# Altium PCB PCB-Mod.PcbDoc (part 1 of 2)
Units mil, origin at the board's own origin, x right, y up, seen from the top; angles counter-clockwise.
Board outline 2755.91 x 1181.1 mil, 4 copper layers (Top Layer, Layer 2, Layer 3, Bottom Layer), stack 61.865 mil thick; 89 components, 59 nets, 279 pads, 158 vias.
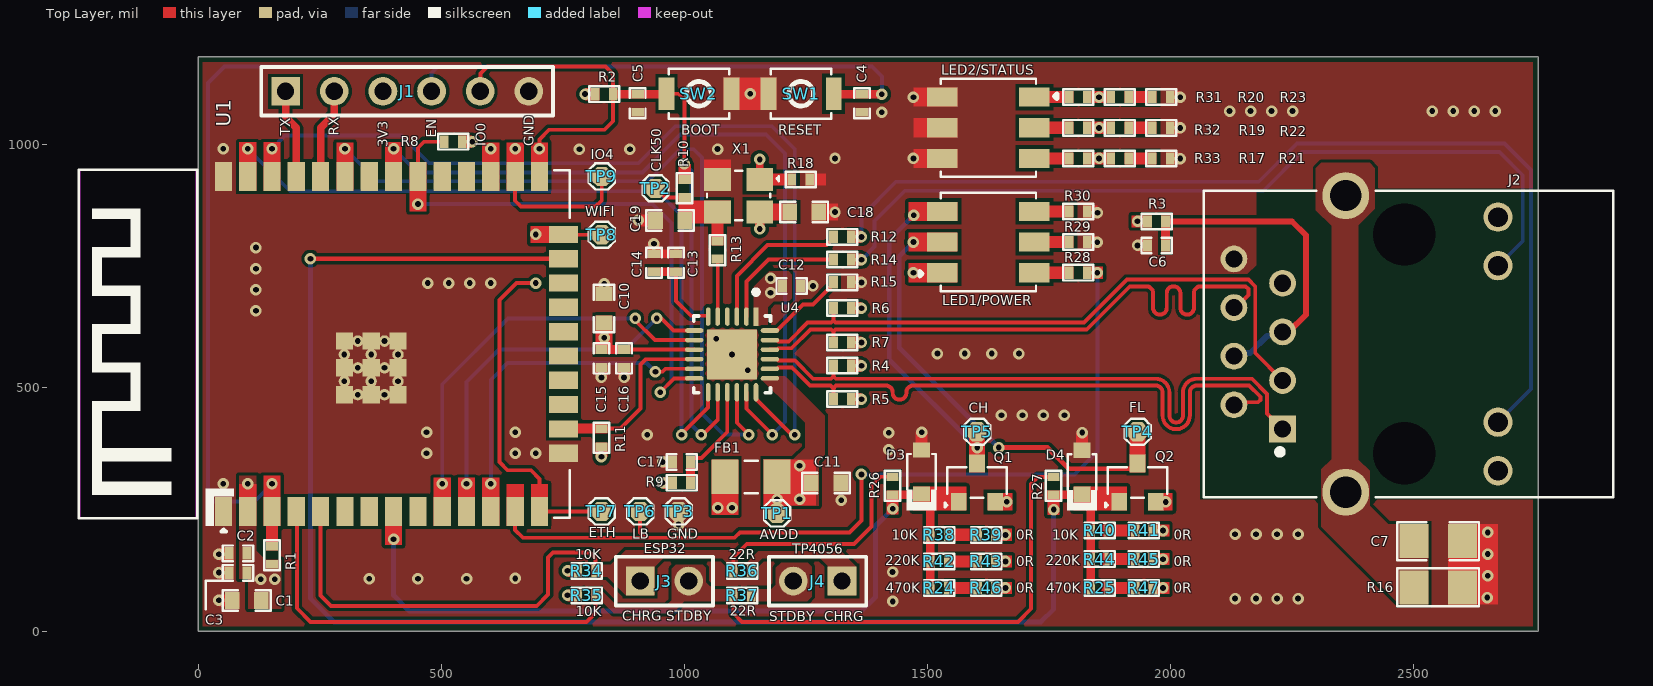
[diagram p0: Top Layer view]
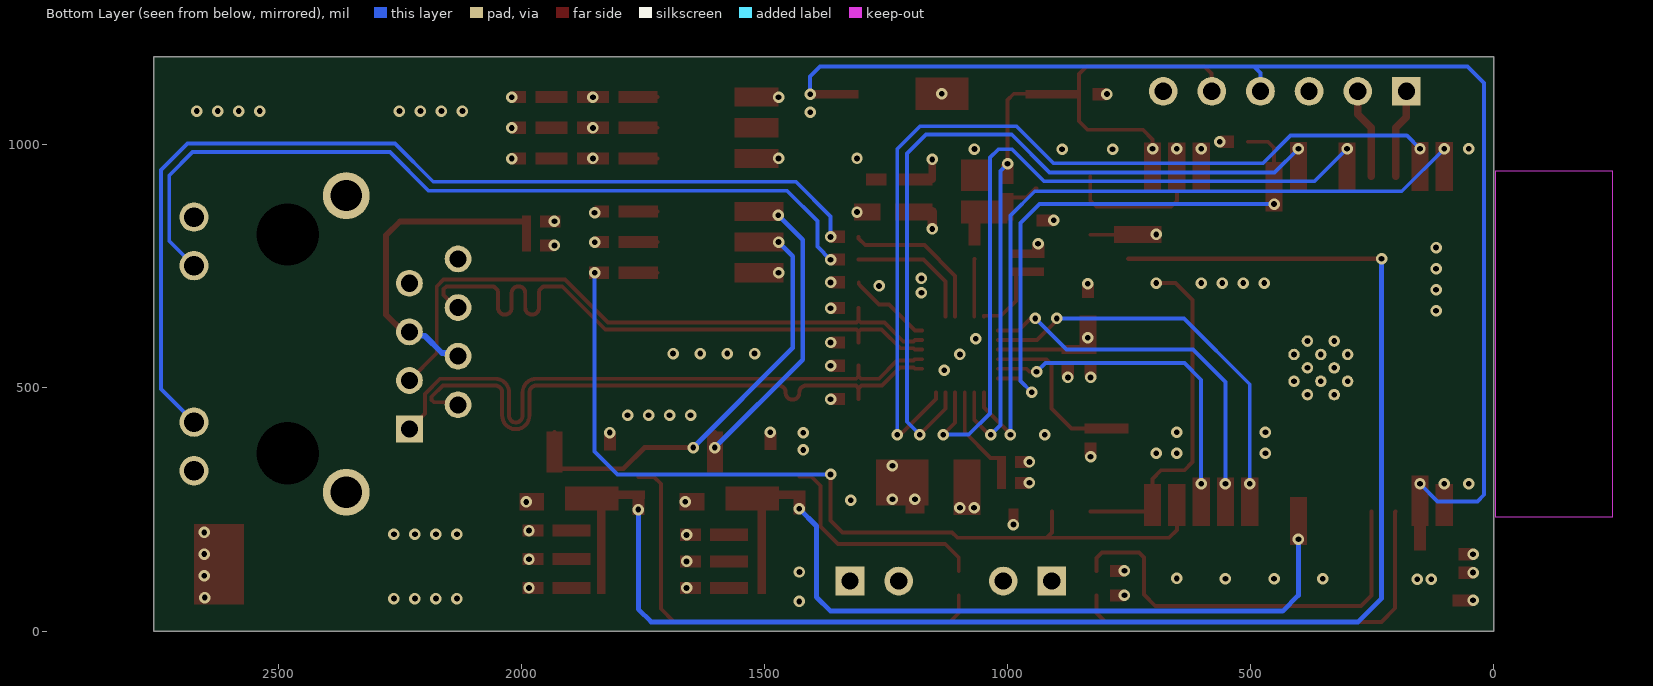
[diagram p1: Bottom Layer view, seen from below]
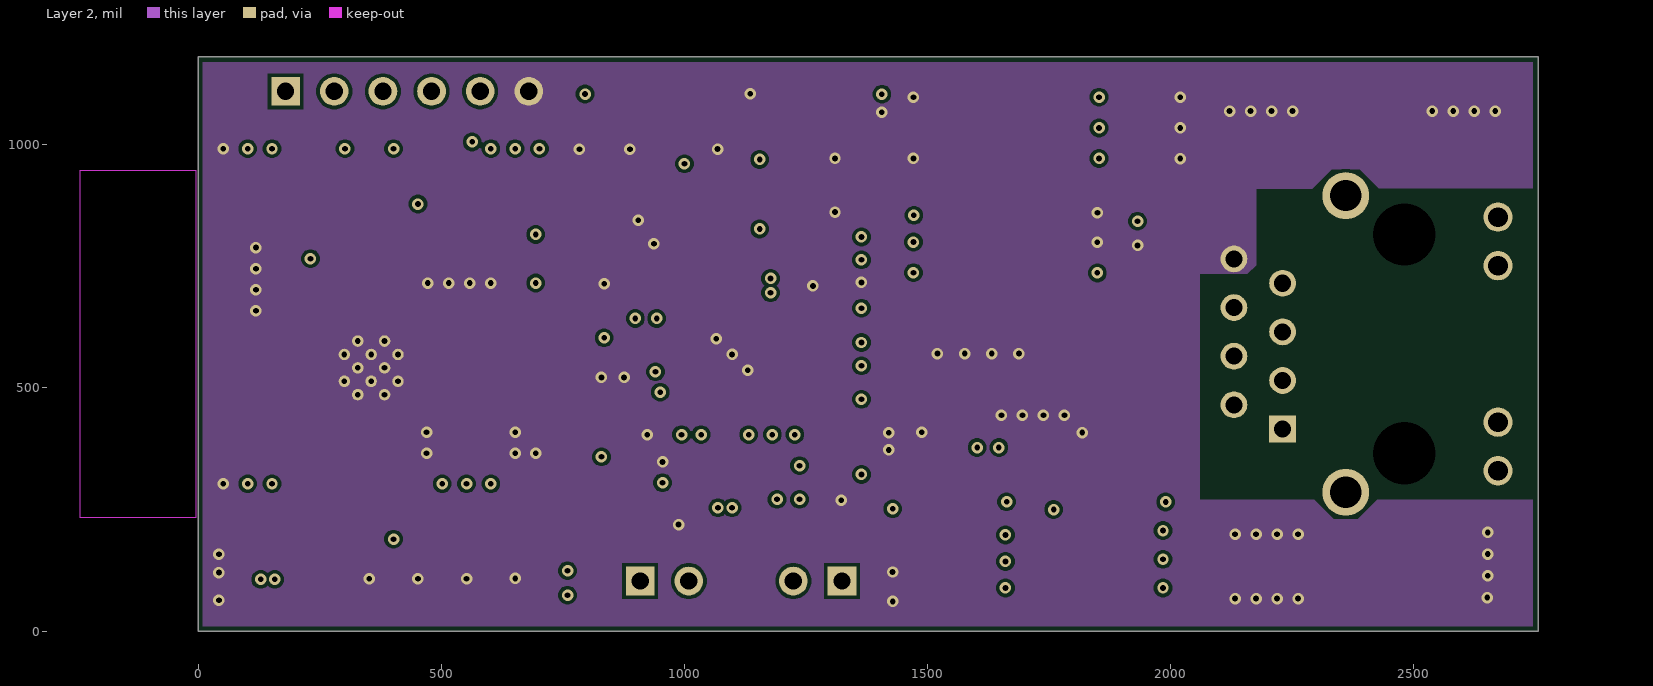
[diagram p2: Layer 2]
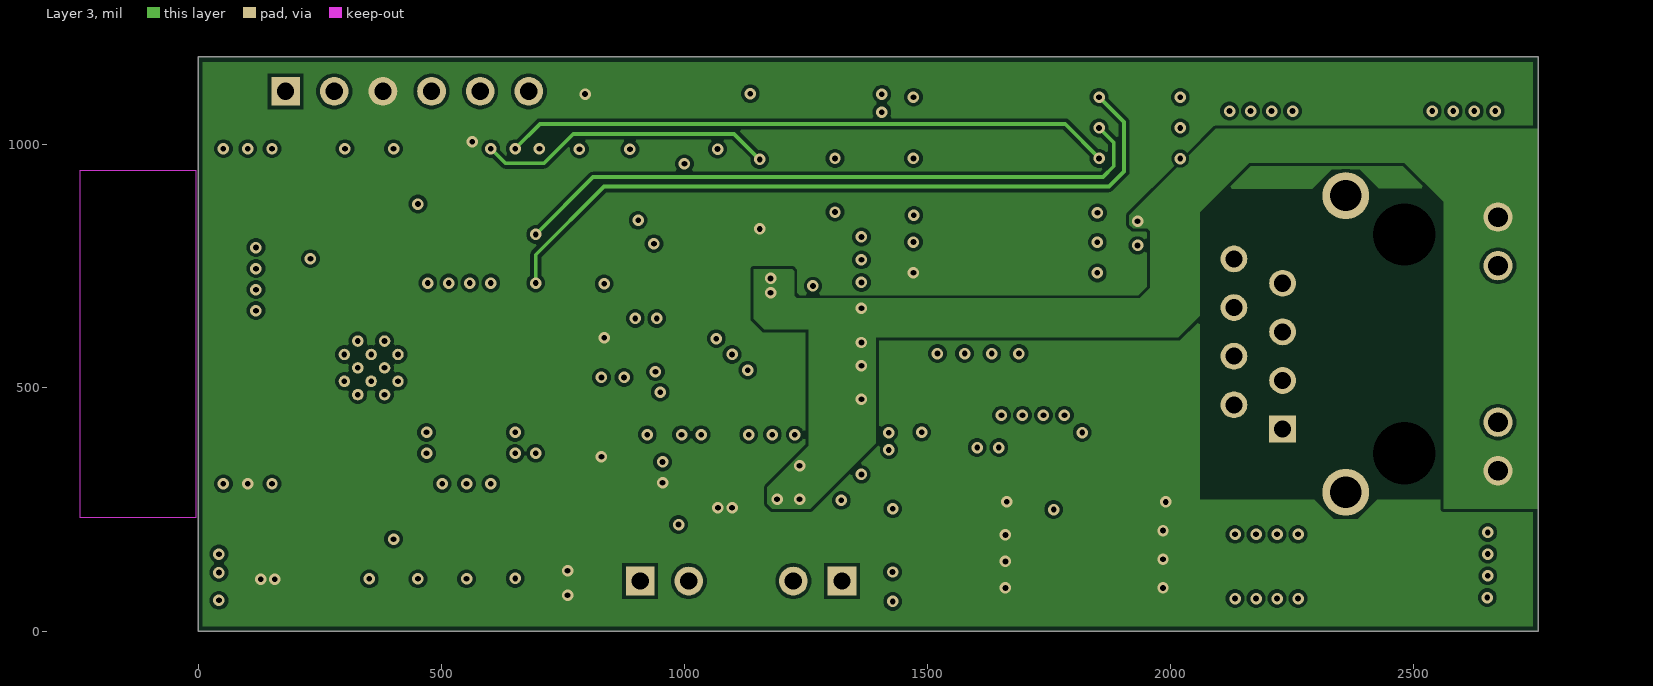
[diagram p3: Layer 3]
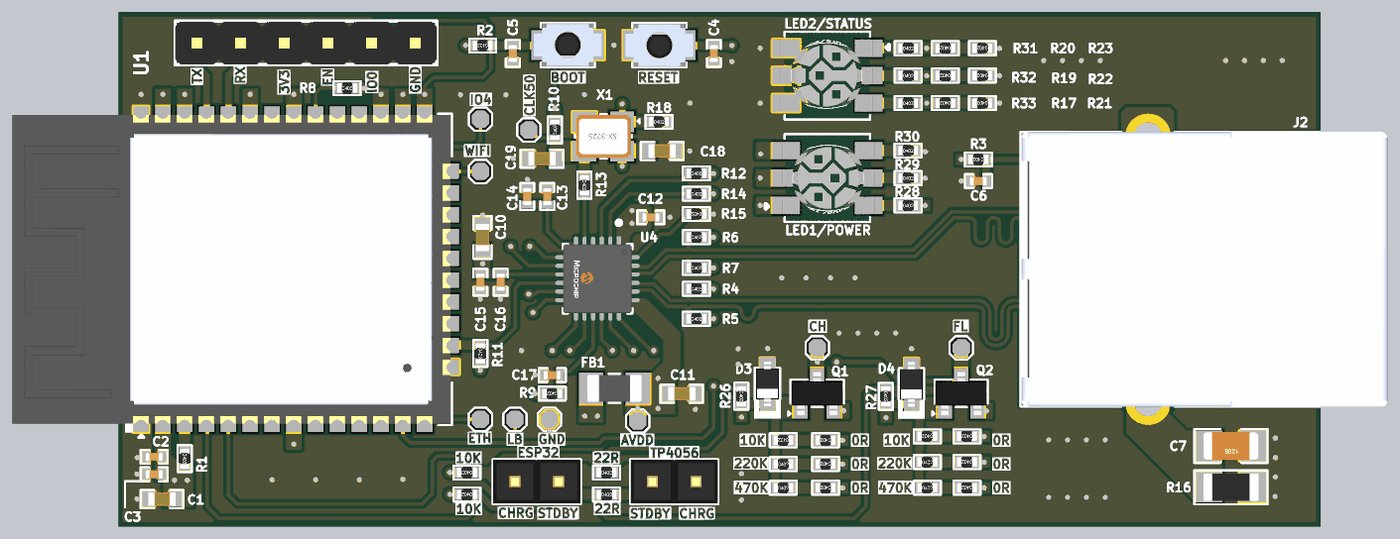
[diagram p4: 3D render of the assembled board from above, using the file's embedded part models]

## Layer stack, top to bottom
Top Solder: solder mask 0.787, Solder Resist, Dk 3.5
Top Layer: signal copper 1.378
Dielectric 2: prepreg 7.992, PP-006, Dk 4.1
Layer 2: signal copper 0.598
Dielectric 1: dielectric 41.929, FR-4, Dk 4.8
Layer 3: signal copper 0.598
Dielectric 3: prepreg 7.992, PP-006, Dk 4.1
Bottom Layer: signal copper 1.378
Bottom Solder: solder mask 0.787, Solder Resist, Dk 3.5

## Board outline
0,0 0,1181.1 2755.91,1181.1 2755.91,0

## Design rules (kind name [scope] priority, off if disabled: settings)
Clearance Clearance_1 [InAnyDifferentialPair] p1: gap=7 ignorepadtopadclearanceinfootprint=FALSE except(6: Arc-Arc Arc-Track Track-Track)
Clearance [All] p2: gap=7 ignorepadtopadclearanceinfootprint=FALSE
DiffPairsRouting [InDifferentialPairClass('Ethernet_Lines')] p1: maxlimit=7 minlimit=6 mostfreqgap=7 toplayer_maxgap=6 toplayer_prefgap=6 toplayer_minwidth=8 toplayer_maxwidth=8 toplayer_prefwidth=8 bottomlayer_maxgap=6 bottomlayer_prefgap=6 bottomlayer_minwidth=8 bottomlayer_maxwidth=8 bottomlayer_prefwidth=8 impedanceprofiledriven=TRUE impedanceprofileid={3DFD65A5-B5EC-4C43-AC0F-D5EC94D6A33B} impedanceprofilevalue=100.000000 maxuncoupledlength=500
HoleSize [All] p1: absolutevalues=TRUE maxlimit=472.44 minlimit=1 maxpercent=80.000 minpercent=20.000
HoleToHoleClearance [All] p1: gap=5 allowstackedmicrovias=TRUE
MatchedLengths "Schematic Matched Net Lengths_1" [InNetClass('Ethernet')] p1: tolerance=20 checknetsindiffpair=FALSE checkdiffpairvsdiffpair=TRUE checkxsignals=TRUE checkothers=TRUE
MaxMinImpedance "Schematic Impedance Constraint" [InNetClass('Ethernet')] p1: minimum=97.00 maximum=105.0
MinimumSolderMaskSliver [All] p1: minsoldermaskwidth=0
PlaneConnect [All] p1: planeconnectstyle=Direct reliefexpansion=20 reliefentries=4 reliefconductorwidth=10 reliefairgap=10
PolygonConnect [All] p1: connectstyle=Direct reliefconductorwidth=10 reliefentries=4 polygonreliefangle="90 Angle" airgapwidth=10
RoutingVias [All] p1: holewidth=11.81 width=23.62 viastyle="Through Hole" minholewidth=11.81 minwidth=23.62 maxholewidth=11.81 maxwidth=23.62
SilkToSilkClearance [All] p1: silktosilkclearance=0
SilkToSolderMaskClearance [IsPad] p1: minsilkscreentomaskgap=0 clearancetoexposedcopper=TRUE
SolderMaskExpansion [All] p1: expansion=4 istentingtop=FALSE
SupplyNets "Schematic Supply Nets_2" [InNet('+3.3_OUT')] p1: voltage=0.000
SupplyNets "Schematic Supply Nets_1" [InNet('GND')] p2: voltage=0.000
SupplyNets "Schematic Supply Nets" [InNet('AVDD')] p3: voltage=0.000
UnRoutedNet [All] p1: checkbadconnections=TRUE
Width [All] p1: maxlimit=50 minlimit=7 preferedwidth=15 minimp=50.000000 maximp=50.000000 favimp=50.000000
22 further rules are at their usual default settings.

## Classes and differential pairs
differential pair class Ethernet_Lines: RX TX
net class Ethernet: RX_N RX_P TX_N TX_P
component class LED_Sheet: D3 D4 J3 J4 LED1/POWER LED2/STATUS Q1 Q2 R17 R19 R20 R21 R22 R23 R24 R25 R26 R27 R28 R29 R30 R31 R32 R33 R34 R35 R36 R37 R38 R39 R40 R41 R42 R43 R44 R45 R46 R47 TP4 TP5 TP6 TP7 TP8 TP9
component class LAN8720A: C6 C7 C10 C11 C12 C13 C14 C15 C16 C17 C18 C19 FB1 J2 R3 R4 R5 R6 R7 R8 R9 R10 R11 R12 R13 R14 R15 R16 R18 TP1 TP2 TP3 U4 X1
component class ESP32: C1 C2 C3 C4 C5 J1 R1 R2 SW1 SW2 U1
differential pair TX: +TX_P -TX_N
differential pair RX: +RX_P -RX_N

## Components (designator, comment, footprint, x,y, rotation, side; value= is the part's Value field where it differs from the comment)
C1 "10uF" Cap-0603 100,63 r180 top
C2 "100nF" cap-0402 82,160.02 r0 top
C3 "100nF" cap-0402 82,120.01 r0 top
C4 "100nF" cap-0402 1365,1085.61 r270 top
C5 "100nF" cap-0402 904.04,1085.6 r270 top
C6 "4.7nF" Cap-0402 1971,792.87 r0 top locked
C7 "4.7nF" Cap-1206 2550,185 r180 top
C10 "10uF" Cap-0603 834.69,663.61 r270 top
C11 "10uF" Cap-0603 1291.16,304.78 r180 top
C12 "100nF" cap-0402 1220.35,709.89 r0 top
C13 "1uF" Cap-0402 983.07,757.33 r270 top
C14 "4.7nF" Cap-0402 937.11,757.53 r90 top
C15 "100nF" cap-0402 829.69,560.8 r270 top
C16 "100nF" cap-0402 876.19,560.8 r270 top
C17 "100nF" cap-0402 994.27,347.5 r0 top
C18 "10uF" Cap-0603 1246.35,861.98 r180 top
C19 "15pF" Cap-0603 970.57,844.48 r0 top
D3 "MM3Z3V3" SOD-323 1487.6,327.26 r90 top
D4 "MM3Z3V3" SOD-323 1817.6,326.52 r90 top
FB1 "100MHz" IND-1206 1137,317.28 r180 top
J1 "X6511WV-06H-C60D30" HDR1X6_ 180,1110 r0 top
J2 "HR911105A" HR911105A 2401.57,590.55 r270 top locked
J3 "826629-2" HDR1X2_ 909,103 r0 top
J4 "826629-2" HDR1X2_ 1324,103 r180 top
LED1/POWER "MHP5050RGBDT" MHP5050RGBDT 1625,800 r0 top (schematic designator LED1)
LED2/STATUS "MHP5050RGBDT" MHP5050RGBDT 1625,1035 r180 top (schematic designator LED2)
Q1 "WPM2341-3/TR" Sot-23 1601.6,305.26 r0 top
Q2 "WPM2341-3/TR" Sot-23 1931.6,305.26 r0 top
R1 "10K" Res-0402 152,156 r270 top
R2 "10K" Res-0402 835,1104.11 r180 top
R3 "0R" Res-0402 1971,842.52 r180 top locked
R4 "49.9R" Res-0402 1324.85,545.83 r0 top
R5 "49.9R" Res-0402 1324.85,477.01 r0 top
R6 "49.9R" Res-0402 1324.85,664.32 r0 top
R7 "49.9R" Res-0402 1324.85,593.82 r0 top
R8 "1.5K" Res-0402 524.43,1006.38 r0 top
R9 "10K" Res-0402 994.28,305.1 r180 top
R10 "33R" Res-0402 1000.57,910.39 r90 top
R11 "10K" Res-0402 829.69,397.5 r270 top
R12 "470R" Res-0402 1324.85,810.82 r0 top
R13 "33R" Res-0402 1068.14,783.45 r270 top
R14 "470R" Res-0402 1324.85,763.82 r0 top
R15 "12.1k" Res-0402 1324.85,717.32 r180 top
R16 "1M" Res-1206 2550,90 r180 top
R17 "0R" Res-0402 1895.31,972.01 r180 top
R18 "10K" Res-0402 1239.06,928.91 r0 top
R19 "0R" Res-0402 1895.31,1035 r180 top
R20 "0R" Res-0402 1895.31,1097.99 r180 top
R21 "10K" Res-0402 1980.5,972.01 r180 top
R22 "10K" Res-0402 1980.5,1035 r180 top
R23 "10K" Res-0402 1980.5,1097.99 r180 top
R24 "470K" Res-0402 1524,89 r0 top value=470kR
R25 "470K" Res-0402 1854,89 r0 top value=470kR
R26 "0R" Res-0402 1428,299 r270 top
R27 "0R" Res-0402 1759,298.73 r270 top
R28 "100R" Res-0402 1810,737.01 r0 top
R29 "100R" Res-0402 1810,800 r0 top
R30 "100R" Res-0402 1810,862.99 r0 top
R31 "100R" Res-0402 1810.11,1097.99 r0 top
R32 "100R" Res-0402 1810.11,1035 r0 top
R33 "100R" Res-0402 1810.11,972.01 r0 top
R34 "100K" Res-0402 799,123.88 r180 top
R35 "100K" Res-0402 799,73.47 r180 top
R36 "22R" Res-0402 1119,123.88 r0 top
R37 "22R" Res-0402 1119,73.47 r0 top
R38 "10K" Res-0402 1524,198 r180 top
R39 "0R" Res-0402 1621,198 r180 top
R40 "10K" Res-0402 1854,207 r180 top
R41 "0R" Res-0402 1945,207 r180 top
R42 "220K" Res-0402 1524,143.5 r0 top
R43 "0R" Res-0402 1621,143.5 r180 top
R44 "220K" Res-0402 1854,148 r0 top
R45 "0R" Res-0402 1945,148 r180 top
R46 "0R" Res-0402 1621,89 r180 top
R47 "0R" Res-0402 1945,89 r180 top
SW1 "B3U-1000P" B3U-1000P 1240,1105 r0 top
SW2 "B3U-1000P" B3U-1000P 1030,1105 r180 top
TP1 "TEST POINT 0.5mm Dia" "Test-point - 0.5mm" 1190.55,242 r90 top
TP2 "TEST POINT 0.5mm Dia" "Test-point - 0.5mm" 940.57,910.39 r90 top
TP3 "TEST POINT 0.5mm Dia" "Test-point - 0.5mm" 987.99,246.06 r90 top
TP4 "TEST POINT 0.5mm Dia" "Test-point - 0.5mm" 1932,410 r90 top
TP5 "TEST POINT 0.5mm Dia" "Test-point - 0.5mm" 1602,410 r90 top
TP6 "TEST POINT 0.5mm Dia" "Test-point - 0.5mm" 909,246.06 r90 top
TP7 "TEST POINT 0.5mm Dia" "Test-point - 0.5mm" 829.69,246.06 r90 top
TP8 "TEST POINT 0.5mm Dia" "Test-point - 0.5mm" 830,815 r90 top
TP9 "TEST POINT 0.5mm Dia" "Test-point - 0.5mm" 830,935 r90 top
U1 "ESP32-WROOM-32E-N4" "38-SMD Module" 401.57,590.55 r90 top locked
U4 "LAN8720A-CP-TR" LAN8720A-CP-TR 1098,569 r270 top locked
X1 "50MHz" OT2EL4C4JI-111OLP-50M 1111.45,895.45 r180 top

## Footprints (in the part's own frame and the unit in brackets; to place one, negate y for a bottom-side part, rotate by r counter-clockwise, add the part's x,y. Pads: shape width x height; smd on the part's side, far side on the other; paste and mask are expansions set on the pad)
"38-SMD Module" [mm]
  rect 1.5x0.9 smd: 1(-8.75,8.88) 2(-8.75,7.61) 3(-8.75,6.34) 4(-8.75,5.07) 5(-8.75,3.8) 6(-8.75,2.53) 7(-8.75,1.26) 8(-8.75,-0.01) 9(-8.75,-1.28) 10(-8.75,-2.55) 11(-8.75,-3.82) 12(-8.75,-5.09) 13(-8.75,-6.36) 14(-8.75,-7.63) 25(8.75,-7.63) 26(8.75,-6.36) 27(8.75,-5.09) 28(8.75,-3.82) 29(8.75,-2.55) 30(8.75,-1.28) 31(8.75,-0.01) 32(8.75,1.26) 33(8.75,2.53) 34(8.75,3.8) 35(8.75,5.07) 36(8.75,6.34) 37(8.75,7.61) 38(8.75,8.88)
  rect 0.9x1.5 smd: 15(-5.71,-8.88) 16(-4.44,-8.88) 17(-3.17,-8.88) 18(-1.9,-8.88) 19(-0.63,-8.88) 20(0.64,-8.88) 21(1.91,-8.88) 22(3.18,-8.88) 23(4.45,-8.88) 24(5.72,-8.88)
  rect 0.9x0.9 smd: 39(-2.65,2.56) 40(-1.25,2.56) 41(0.15,2.56) 42(-2.65,1.16) 43(-1.25,1.16) 44(0.15,1.16) 45(-2.65,-0.24) 46(-1.25,-0.24) 47(0.15,-0.24)
  round 0.6 hole 0.3 mask+0: 39_10(-1.95,2.56) 39_11(-0.55,2.56) 39_12(-2.65,1.86) 39_13(-1.25,1.86) 39_14(0.15,1.86) 39_15(-1.95,1.16) 39_16(-0.55,1.16) 39_17(-2.65,0.46) 39_18(-1.25,0.46) 39_19(0.15,0.46) 39_20(-1.95,-0.24) 39_21(-0.55,-0.24)
  Keep-Out Layer region: -9.042,10.287 9.042,10.287 9.042,16.383 -9.042,16.383
  silkscreen extent -9.8,-9.22 9.09,16.43, body extent -9,-9.12 9,16.38, height 3.25
B3U-1000P [mm] "SWITCH TACTILE SPST-NO 0.05A 12V"
  rect 0.82x1.72 smd: 1(-1.7,0) 2(1.7,0)
  silkscreen extent -1.57,-1.3 1.57,1.3, body extent -2,-1.26 2,1.24, height 1.6
cap-0402 [mil]
  rect 18x25 smd mask+2.36: 1(-18.5,0) 2(18.5,0)
  silkscreen extent -31,-16 31,16, body extent -20,-10 20,10, height 19
Cap-0402 [mil]
  rect 18x25 smd mask+2.36: 1(-18.5,0) 2(18.5,0)
  silkscreen extent -31,-16 31,16, body extent -20,-10 20,10, height 19
Cap-0603 [mil]
  rect 30x35 smd mask+2.36: 1(-30,0) 2(30,0)
  silkscreen extent -49,-21 49,21, body extent -32,-16 31,16, height 34
Cap-1206 [mil] "SMD 1206"
  rect 60x70 smd: 1(-50,0) 2(50,0)
  silkscreen extent -84,-39 84,39, body extent -63,-31 63,32, height 39
HDR1X2_ [mm] "CONN HEADER VERT 2POS 2.54MM"
  rect 1.5x1.5 hole 0.9: 1(0,0)
  round 1.5 hole 0.9: 2(2.54,0)
  silkscreen extent -1.27,-1.27 3.81,1.27, body extent -1.27,-1.27 3.81,1.27, height 8.44
HDR1X6_ [mm] "Connector; Header; 6 Position"
  rect 1.5x1.5 hole 0.9: 1(0,0)
  round 1.5 hole 0.9: 2(2.54,0) 3(5.08,0) 4(7.62,0) 5(10.16,0) 6(12.7,0)
  silkscreen extent -1.27,-1.27 13.97,1.27, body extent -1.27,-1.24 13.97,1.25, height 8.54
HR911105A [mm]
  rect 1.398x1.398 hole 0.89: 1(4.45,-4.355)
  round 1.398 hole 0.89: 2(3.18,-6.895) 3(1.91,-4.355) 4(0.64,-6.895) 5(-0.63,-4.355) 6(-1.9,-6.895) 7(-3.17,-4.355) 8(-4.44,-6.895)
  round 1.53 hole 1.02: 9(6.625,6.895) 10(4.085,6.895) 11(-4.085,6.895) 12(-6.625,6.895)
  round 0 hole 3.25 unplated: MH1(-5.715,1.995) MH2(5.715,1.995)
  round 2.445 hole 1.63: "Shield 1"(-7.745,-1.055) "Shield 2"(7.745,-1.055)
  silkscreen extent -8,-8.48 8,12.92, body extent -8.02,-8.42 8.02,12.88, height 13.5
IND-1206 [mm]
  rect 1.4x1.82 smd: 1(-1.36,0) 2(1.36,0)
  silkscreen extent -0.34,-0.85 0.34,0.85, body extent -1.6,-0.8 1.6,0.8, height 1.3
LAN8720A-CP-TR [mm]
  rect 0.961x0.239 smd paste+0 mask+0: 1(-1.976,1.25)
  rrect100% 0.961x0.239 smd paste+0 mask+0: 2(-1.976,0.75) 3(-1.976,0.25) 4(-1.976,-0.25) 5(-1.976,-0.75) 6(-1.976,-1.25) 13(1.976,-1.25) 14(1.976,-0.75) 15(1.976,-0.25) 16(1.976,0.25) 17(1.976,0.75) 18(1.976,1.25)
  rrect100% 0.239x0.961 smd paste+0 mask+0: 7(-1.25,-1.976) 8(-0.75,-1.976) 9(-0.25,-1.976) 10(0.25,-1.976) 11(0.75,-1.976) 12(1.25,-1.976) 19(1.25,1.976) 20(0.75,1.976) 21(0.25,1.976) 22(-0.25,1.976) 23(-0.75,1.976) 24(-1.25,1.976)
  rect 2.6x2.6 smd paste-1000 mask+0: 25(0,0)
  silkscreen extent -3.38,-2 2,2, body extent -2.96,-2.96 2.96,2.96, height 0.25
MHP5050RGBDT [mm]
  rect 1.6x1 smd: 1(-2.4,-1.6) 2(2.4,-1.6) 3(-2.4,0) 4(2.4,0) 5(-2.4,1.6) 6(2.4,1.6)
  silkscreen extent -3.58,-2.57 2.49,2.57, body extent -2.66,-2.5 2.74,2.5, height 1.62
OT2EL4C4JI-111OLP-50M [mm]
  rect 1.4x1.2 smd: 1(-1.1,-0.85) 2(1.1,-0.85) 3(1.1,0.85) 4(-1.1,0.85)
  silkscreen extent -2.11,-1.3 1.65,1.3, body extent -1.6,-1.25 1.6,1.25, height 0.81
Res-0402 [mil]
  rect 18x25 smd mask+2.17: 1(-18.5,0) 2(18.5,0)
  silkscreen extent -32,-17 32,16, body extent -23,-11 23,11, height 16
Res-1206 [mil]
  rect 60x70 smd: 1(-50,0) 2(50,0)
  silkscreen extent -84,-39 84,39, body extent -63,-31 63,31, height 24
SOD-323 [mm]
  rect 0.8x0.9 smd mask+0.055: 1(-1.15,0) 2(1.15,0)
  silkscreen extent -2.01,-0.79 0.94,0.79, body extent -1.3,-0.67 1.3,0.67, height 1.1
Sot-23 [mm] "TRANS NPN 40V 0.6A SOT23"
  rect 0.82x0.92 smd: 1(-0.95,-1) 2(0.95,-1) 3(0,1)
  silkscreen extent -1.68,-1.3 1.55,0.81, body extent -1.5,-1.25 1.5,1.25, height 1.05
"Test-point - 0.5mm" [mm]
  oct 1x1 smd: 1(0,0)
  silkscreen extent -0.68,-0.68 0.68,0.68

## Part data
C1: library part CC0603KRX5R7BB106, "CAP CER 10UF 16V X5R 0603", Case Code (Imperial)=0603, Case Code (Metric)=1608, LCSC Part Number=C2936601, Manufacturer=Yageo, Max Operating Temperature=85°C, Min Operating Temperature=-55°C, Supplier Part Number 1=311-3486-1-ND, Tolerance=10%, Voltage Rating=16V, Capacitance=10uF, Case/Package=0603, Category="Ceramic Capacitors", ComponentLink1Description=http://www.yageo.com/documents/recent/UPY-GPHC_X5R_4V-to-50V_25.pdf?src-supplier=Digi-Key, ComponentLink1URL=http://www.yageo.com/documents/recent/UPY-GPHC_X5R_4V-to-50V_25.pdf?src-supplier=Digi-Key, Item Type=Capacitor, Manufacturer Part Number=CC0603KRX5R7BB106, Mount="Surface Mount", Packaging="Cut Tape", Pricing 1="1=0.68000, 10=0.48000, 50=0.36300, 100=0.31610, 500=0.23416, 1000=0.19903 (USD)", RoHS=Yes, RoHS Compliant=Yes, Stock 1=240725, Supplier 1=Digi-Key
C2 C3 C4 C5 C12 C15 C16 C17: library part C1005X7R1H104KT000F, "CAP CER 0.1UF 50V X7R 0402", Dielectric=X7R, LCSC Part Number=C361198, Manufacturer=TDK, Tolerance=10%, Voltage=25V, Category="Ceramic Capacitors", ComponentLink1Description=LCSC, ComponentLink1URL=https://www.lcsc.com/product-detail/Multilayer-Ceramic-Capacitors-MLCC-SMD-SMT_TDK-C1005X7R1H104KT000F_C361198.html, Item Type=Capacitor, Manufacturer Part Number=C1005X7R1H104KT000F, RoHS=No, Supplier 1=Avnet, Supplier Part Number 1=C1005X7R1H104KT000F
C6 C14: library part CC0402KRX7R9BB472, "CAP CER 4700PF 50V X7R 0402", Case Code (Imperial)=0402, Case Code (Metric)=1005, Dielectric=X7R, LCSC Part Number=C106208, Manufacturer=Yageo, Max Operating Temperature=125°C, Min Operating Temperature=-55°C, Package Quantity=1, Supplier Part Number 1=1989300, Temperature Coefficient=30ppm/°C, Tolerance=10%, Voltage Rating=50V, Capacitance=4.7nF, Case/Package=0402, Category="Ceramic Capacitors", ComponentLink1Description=https://datasheet.ciiva.com/7978/1489800-7978108.pdf?src-supplier=Element14, ComponentLink1URL=https://datasheet.ciiva.com/7978/1489800-7978108.pdf?src-supplier=Element14, ComponentLink2Description=https://datasheet.ciiva.com/176/mlccorderingcode-176364.pdf?src-supplier=Digikey, ComponentLink2URL=https://datasheet.ciiva.com/176/mlccorderingcode-176364.pdf?src-supplier=Digikey, ComponentLink3Description=https://datasheet.ciiva.com/176/mlccorderingcode-176363.pdf?src-supplier=Digikey, ComponentLink3URL=https://datasheet.ciiva.com/176/mlccorderingcode-176363.pdf?src-supplier=Digikey, ComponentLink4Description=https://datasheet.ciiva.com/176/mlccorderingcode-176365.pdf?src-supplier=Digikey, ComponentLink4URL=https://datasheet.ciiva.com/176/mlccorderingcode-176365.pdf?src-supplier=Digikey, ComponentLink5Description=https://datasheet.ciiva.com/11586/upy-gphc-x7r-6-3v-to-50v-8-11586491.pdf?src-supplier=Avnet, ComponentLink5URL=https://datasheet.ciiva.com/11586/upy-gphc-x7r-6-3v-to-50v-8-11586491.pdf?src-supplier=Avnet, Construction=Flat, Depth=0.5mm, Halogen Free=5694HalogenFree, Height=0.5mm, Item Type=Capacitor, Lead Free=5697LeadFree, Length=1mm, Manufacturer Part Number=CC0402KRX7R9BB472, Material=4241ConductorMaterial, Mount="Surface Mount", Number of Pins=2NUMBER, Packaging="Tape and Reel", Pricing 1="10000=0.0021, 40000=0.002, 150000=0.0019, 400000=0.0018, 1000000=0.0017 (USD)", Radiation Hardening=No, Reach SVHC Compliant=No, RoHS=Yes, RoHS Compliant=Yes, Series=CC, Stock 1=1780000, Supplier 1="Future Electronics", Termination=SMD/SMT, Thickness=0.022inch, Voltage Rating (DC)=50V, Width=0.02inch
C7: library part CC1206KKX7RCBB472, "CAP CER 4700PF 1KV X7R 1206", Case Code (Imperial)=1206, Case Code (Metric)=3216, Dielectric=X7R, Dielectric Material=Ceramic, LCSC Part Number=C107198, Manufacturer=Yageo, Max Operating Temperature=125°C, Min Operating Temperature=-55°C, Supplier Part Number 1=7130131, Tolerance=10%, Voltage Rating=1kV, Capacitance=4.7nF, Case/Package=1206, Category="Ceramic Capacitors", ComponentLink1Description=https://datasheet.ciiva.com/13208/upy-gp-np0-16v-to-50v-8-13208693.pdf?src-supplier=Mouser, ComponentLink1URL=https://datasheet.ciiva.com/13208/upy-gp-np0-16v-to-50v-8-13208693.pdf?src-supplier=Mouser, ComponentLink2Description=https://datasheet.ciiva.com/11466/hv-11466701.pdf?src-supplier=Avnet, ComponentLink2URL=https://datasheet.ciiva.com/11466/hv-11466701.pdf?src-supplier=Avnet, Depth=1.6mm, Item Type=Capacitor, Lead Free="Lead Free", Length=3.2mm, Manufacturer Part Number=CC1206KKX7RCBB472, Mount="Surface Mount", Number of Pins=2, Packaging="Tape and Reel", Pricing 1="3000=0.02860, 9000=0.02750, 15000=0.02700, 45000=0.02600, 75000=0.02510 (USD)", Radiation Hardening=No, Resistor Type=Ceramic, RoHS=Yes, RoHS Compliant=Yes, Series=CC, Stock 1=180000, Supplier 1="Future Electronics", Termination=SMD/SMT, Thickness=0.057inch, Voltage Rating (DC)=1kV, Weight=0.000571oz, Width=0.063inch
C10 C11 C18: library part CL10A106MA8NRNC, "CAP CER 10UF 25V X5R 0603", Case Code (Imperial)=0603, Case Code (Metric)=1608, Dielectric=X5R, LCSC Part Number=C96446, Manufacturer=Samsung, Max Operating Temperature=85°C, Min Operating Temperature=-55°C, Package Quantity=1, Tolerance=20%, Voltage Rating=25V, Capacitance=10uF, Case/Package=0603, Category="Ceramic Capacitors", ComponentLink1Description=https://datasheet.ciiva.com/25766/cl10a106ma8nrnc-25766562.pdf?src-supplier=Digi-Key, ComponentLink1URL=https://datasheet.ciiva.com/25766/cl10a106ma8nrnc-25766562.pdf?src-supplier=Digi-Key, Construction=Flat, Contact Plating=Tin, Lead Free="Lead Free", Length=0.063inch, Manufacturer Part Number=CL10A106MA8NRNC, Mount="Surface Mount", Packaging="Tape and Reel", Pricing 1="4000=0.03753, 8000=0.03700, 16000=0.03595, 24000=0.03515, 32000=0.03383, 40000=0.03304, 400000=0.03225 (USD)", RoHS=Yes, RoHS Compliant=Yes, Series=CL, Supplier 1=Avnet, Supplier Part Number 1=CL10A106MA8NRNC, Termination=Wraparound, Thickness=0.035inch, Width=0.031inch
C13: library part CC0402KRX5R7BB105, "CAP CER 1UF 16V X5R 0402", Case Code (Imperial)=0402, Case Code (Metric)=1005, Dielectric=X5R, LCSC Part Number=C325464, Manufacturer=Yageo, Max Operating Temperature=85°C, Min Operating Temperature=-55°C, Supplier Part Number 1=311-1691-6-ND, Tolerance=10%, Voltage Rating=16V, Capacitance=1uF, Case/Package=0402, ComponentLink1Description=http://www.yageo.com/documents/recent/UPY-GPHC_X5R_4V-to-50V_12.pdf?src-supplier=Avnet+Europe, ComponentLink1URL=http://www.yageo.com/documents/recent/UPY-GPHC_X5R_4V-to-50V_12.pdf?src-supplier=Avnet+Europe, Composition=Ceramic, Depth=0.5mm, Halogen Free="Halogen Free", Height=0.5mm, Item Type=Capacitor, Lead Free="Lead Free", Length=1mm, Manufacturer Part Number=CC0402KRX5R7BB105, Mount="Surface Mount", Packaging="Tape and Reel", Pricing 1="1=0.36, 10=0.252, 100=0.1512, 500=0.1134, 1000=0.09576, 2500=0.09072, 5000=0.08568 (USD)", Radiation Hardening=No, Stock 1=1405667, Supplier 1=Digi-Key, Termination=SMD/SMT, Thickness=0.022inch, Voltage Rating (DC)=16V, Weight=2.3E-05oz, Width=0.02inch
C19: library part CC0603JRNPO9BN150, "CAP CER 15PF 50V C0G/NPO 0603", Case Code (Imperial)=0603, Case Code (Metric)=1608, Dielectric=C0G, Dielectric Material=Ceramic, Insulation Resistance=100GR, LCSC Part Number=C107037, Manufacturer=Yageo, Max Operating Temperature=125°C, Min Operating Temperature=-55°C, Package Quantity=1, Supplier Part Number 1=4234670, Tolerance=5%, Voltage Rating=50V, Case/Package=0603, Category="Ceramic Capacitors", ComponentLink1Description=https://datasheet.ciiva.com/144/mlccorderingcode-144635.pdf?src-supplier=Digi-Key, ComponentLink1URL=https://datasheet.ciiva.com/144/mlccorderingcode-144635.pdf?src-supplier=Digi-Key, ComponentLink2Description=https://datasheet.ciiva.com/144/mlccorderingcode-144636.pdf?src-supplier=Digi-Key, ComponentLink2URL=https://datasheet.ciiva.com/144/mlccorderingcode-144636.pdf?src-supplier=Digi-Key, ComponentLink3Description=https://datasheet.ciiva.com/8033/1443161-8033721.pdf?src-supplier=Element14, ComponentLink3URL=https://datasheet.ciiva.com/8033/1443161-8033721.pdf?src-supplier=Element14, ComponentLink4Description=https://datasheet.ciiva.com/28450/1443161-28450472.pdf?src-supplier=Element14, ComponentLink4URL=https://datasheet.ciiva.com/28450/1443161-28450472.pdf?src-supplier=Element14, ComponentLink5Description=https://datasheet.ciiva.com/144/mlccorderingcode-144634.pdf?src-supplier=Digi-Key, ComponentLink5URL=https://datasheet.ciiva.com/144/mlccorderingcode-144634.pdf?src-supplier=Digi-Key, ComponentLink6Description=https://datasheet.ciiva.com/8033/1734582-8033723.pdf?src-supplier=Element14, ComponentLink6URL=https://datasheet.ciiva.com/8033/1734582-8033723.pdf?src-supplier=Element14, ComponentLink7Description=https://datasheet.ciiva.com/8033/1734582-8033722.pdf?src-supplier=Element14, ComponentLink7URL=https://datasheet.ciiva.com/8033/1734582-8033722.pdf?src-supplier=Element14, ComponentLink8Description=https://datasheet.ciiva.com/11464/upy-gp-np0-16v-to-50v-8-11464727.pdf?src-supplier=Avnet, ComponentLink8URL=https://datasheet.ciiva.com/11464/upy-gp-np0-16v-to-50v-8-11464727.pdf?src-supplier=Avnet, Depth=0.8mm, Height=0.8mm, Item Type=Capacitor, Lead Free="Lead Free", Length=1.6mm, Manufacturer Part Number=CC0603JRNPO9BN150, Mounting Technology="Surface Mount", Packaging="Tape and Reel", Pins=2, Pricing 1="4000=0.0038, 16000=0.0036, 80000=0.0034, 160000=0.0033, 500000=0.0031 (USD)", Radiation Hardening=No, Reach SVHC Compliant=No, RoHS=Yes, RoHS Compliant=Yes, Series=CC, Stock 1=832000, Supplier 1="Future Electronics", Termination=SMD/SMT, Thickness=0.035inch, Width=0.031inch
D3 D4: "±5% Single 3.1V~3.5V 300mW 3.3V SOD-323 Zener Diodes ROHS", LCSC Part Number=C123917, Manufacturer=JSMSEMI, Package=SOD-323, ComponentLink1Description=LCSC, ComponentLink1URL=https://www.lcsc.com/product-detail/Zener-Diodes_Shandong-Jingdao-Microelectronics-MM3Z3V3_C123917.html, Item Type=Diode, Manufacturer Part Number=MM3Z3V3
FB1: library part BLM31PG121SN1L, "FERRITE BEAD 120 OHM 1206 1LN", Case Code (Imperial)=1206, Case Code (Metric)=3216, Current Rating=3.5A, DC Current=3A, DC Resistance (DCR)=20mR, LCSC Part Number=C85841, Manufacturer=Murata, Max Operating Temperature=125°C, Min Operating Temperature=-55°C, Package Quantity=3000, Tolerance=25%, Case/Package=1206, Category="Ferrite Beads and Chips", ComponentLink1Description=https://datasheet.ciiva.com/19460/1845419-19460234.pdf?src-supplier=Jameco, ComponentLink1URL=https://datasheet.ciiva.com/19460/1845419-19460234.pdf?src-supplier=Jameco, ComponentLink2Description=https://datasheet.ciiva.com/1012/l0132s0193blm31p-1012992.pdf?src-supplier=Digi-Key, ComponentLink2URL=https://datasheet.ciiva.com/1012/l0132s0193blm31p-1012992.pdf?src-supplier=Digi-Key, ComponentLink3Description=https://datasheet.ciiva.com/11799/0900766b811b5866-11799444.pdf?src-supplier=RSComponents, ComponentLink3URL=https://datasheet.ciiva.com/11799/0900766b811b5866-11799444.pdf?src-supplier=RSComponents, ComponentLink4Description=https://datasheet.ciiva.com/3081/l0110s0100blm31p-3081665.pdf?src-supplier=Avnet, ComponentLink4URL=https://datasheet.ciiva.com/3081/l0110s0100blm31p-3081665.pdf?src-supplier=Avnet, ComponentLink5Description=https://datasheet.ciiva.com/41449/001172383-da-01-en-drossel-1206-120r-3-2x1-60mm-3000st-41449554.pdf?src-supplier=Conrad, ComponentLink5URL=https://datasheet.ciiva.com/41449/001172383-da-01-en-drossel-1206-120r-3-2x1-60mm-3000st-41449554.pdf?src-supplier=Conrad, ComponentLink6Description=https://datasheet.ciiva.com/29348/442557-da-01-en-chip-drossel-1206-120r-3000ma-3-2x1-60mm-29348014.pdf?src-supplier=Conrad, ComponentLink6URL=https://datasheet.ciiva.com/29348/442557-da-01-en-chip-drossel-1206-120r-3000ma-3-2x1-60mm-29348014.pdf?src-supplier=Conrad, ComponentLink7Description=https://datasheet.ciiva.com/14122/apblm31p-data-e-14122856.pdf?src-supplier=Distrelec, ComponentLink7URL=https://datasheet.ciiva.com/14122/apblm31p-data-e-14122856.pdf?src-supplier=Distrelec, ComponentLink8Description=https://datasheet.ciiva.com/48436/blm31pg121sn1l-eng-tds-48436731.pdf?src-supplier=Distrelec, ComponentLink8URL=https://datasheet.ciiva.com/48436/blm31pg121sn1l-eng-tds-48436731.pdf?src-supplier=Distrelec, ComponentLink9Description=https://datasheet.ciiva.com/1012/l0110s0100blm31p-1012991.pdf?src-supplier=Digi-Key, ComponentLink9URL=https://datasheet.ciiva.com/1012/l0110s0100blm31p-1012991.pdf?src-supplier=Digi-Key, ComponentLink10Description=https://datasheet.ciiva.com/1012/l0110s0100blm31p-1012993.pdf?src-supplier=Digi-Key, ComponentLink10URL=https://datasheet.ciiva.com/1012/l0110s0100blm31p-1012993.pdf?src-supplier=Digi-Key, ComponentLink11Description=https://datasheet.ciiva.com/3081/l0110s0100blm31p-3081666.pdf?src-supplier=Avnet, ComponentLink11URL=https://datasheet.ciiva.com/3081/l0110s0100blm31p-3081666.pdf?src-supplier=Avnet, ComponentLink12Description=https://datasheet.ciiva.com/16390/l0110s0100blm31p-16390857.pdf?src-supplier=Future+Electronics, ComponentLink12URL=https://datasheet.ciiva.com/16390/l0110s0100blm31p-16390857.pdf?src-supplier=Future+Electronics, ComponentLink13Description=https://datasheet.ciiva.com/18093/getdatasheetpartid-152966-18093084.pdf?src-supplier=Verical, ComponentLink13URL=https://datasheet.ciiva.com/18093/getdatasheetpartid-152966-18093084.pdf?src-supplier=Verical, Contact Plating=Tin,Matte, Core Material=Ferrite, Depth=1.6mm, Frequency=100MHz, Height=1.1mm, Impedance=120R, Item Type="Ferrite Bead", Lead Free="Lead Free", Length=3.2mm, Manufacturer Part Number=BLM31PG121SN1L, Material=Steel,Ferrite, Max Current Rating=3.5A, Max DC Current=3A, Military Standard=Not, Number of Lines=1, Number of Pins=2, Packaging="Tape and Reel", Pricing 1="3000=0.11563, 6000=0.10938, 12000=0.10313, 18000=0.09688, 24000=0.09063, 30000=0.08438, 300000=0.07813 (USD)", Radiation Hardening=No, RoHS=Yes, RoHS Compliant=Yes, Shielding=Unshielded, Stock 1=290640, Supplier 1=Avnet, Supplier Part Number 1=BLM31PG121SN1L, Termination=SMD/SMT, Test Frequency=100MHz, Width=1.6mm
J1: "Gold 250V 3A Straight Square Pins 2.5mm 6P 260℃ 6mm -40℃~+105℃ 3mm 2.54mm Plugin Black Brass 1x6P Plugin,P=2.54mm Pin Headers ROHS", LCSC Part Number=C706878, Manufacturer=XKB, Package=Plugin,P=2.54mm, ComponentLink1Description=LCSC, ComponentLink1URL=https://www.lcsc.com/product-detail/Pin-Headers_XKB-Connectivity-X6511WV-06H-C60D30_C706878.html, Item Type="Male Header", Manufacturer Part Number=X6511WV-06H-C60D30
J2: "RJ45 RJReceptacle 1 WithLED Plugin Ethernet Connectors/Modular Connectors (RJ45 RJ11) ROHS", LCSC Part Number=C12074, Manufacturer=HANRUN, Package=Plugin, ComponentLink1Description=LCSC, ComponentLink1URL=https://www.lcsc.com/product-detail/Ethernet-Connectors-Modular-Connectors-RJ45-RJ11_HANRUN-Zhongshan-HanRun-Elec-HR911105A_C12074.html, Item Type="RJ45 Connector", Manufacturer Part Number=HR911105A
J3 J4: "CONN HEADER VERT 2POS 2.54MM", Color=Green, Current Rating=3A, Flammability Rating="UL94 V-0", High Temperature Housing=No, LCSC Part Number=C86471, Manufacturer="TE Connectivity", Manufacturer Part Number=8266292, Max Operating Temperature=105°C, Min Operating Temperature=-65°C, Package Quantity=3000, Supplier Part Number 1=1361864, Board Standoff="No (Without)", Category="Board to Board Connectors", ComponentLink1Description=https://datasheet.ciiva.com/11746/0900766b80d7c358-11746248.pdf?src-supplier=RSComponents, ComponentLink1URL=https://datasheet.ciiva.com/11746/0900766b80d7c358-11746248.pdf?src-supplier=RSComponents, ComponentLink2Description=https://datasheet.ciiva.com/30224/8266292-30224019.pdf?src-supplier=Onlinecomponents.com, ComponentLink2URL=https://datasheet.ciiva.com/30224/8266292-30224019.pdf?src-supplier=Onlinecomponents.com, ComponentLink3Description=https://datasheet.ciiva.com/29369/001094754-da-01-en-stiftleiste-1-reihig-0-0826629-2-29369600.pdf?src-supplier=Conrad, ComponentLink3URL=https://datasheet.ciiva.com/29369/001094754-da-01-en-stiftleiste-1-reihig-0-0826629-2-29369600.pdf?src-supplier=Conrad, ComponentLink4Description=https://datasheet.ciiva.com/6857/eng-cd-826629-aa-basefilename-6857135.pdf?src-supplier=Digi-Key, ComponentLink4URL=https://datasheet.ciiva.com/6857/eng-cd-826629-aa-basefilename-6857135.pdf?src-supplier=Digi-Key, ComponentLink5Description=https://datasheet.ciiva.com/14120/eh826629-draw-14120837.pdf?src-supplier=Distrelec, ComponentLink5URL=https://datasheet.ciiva.com/14120/eh826629-draw-14120837.pdf?src-supplier=Distrelec, Connector Type=Plug,Header,Pin, Contact Gender=Male, Contact Material=Bronze, Contact Mating Length=6.7mm, Contact Plating=Gold,Tin, Contact Post Length=0.1259inch, Contact Protection="No (Without)", Contact Shape=Square, Contact Type="Male Pin", Depth=2.5mm, ELV=Compliant, Gasket="No (Without)", Gender=Male, High Speed Serial Data Connector=No, Housing Color=Green, Housing Material=PBT, Item Type="Male Header", Keyed=No, Lead Free="Lead Free", Length=5.08mm, Mating Alignment="No (Without)", Mating Connector Lock="No (Without)", Mount="Straddle Mount", Number of Contacts=2, Number of Positions=2, Number of Rows=1, Orientation=Straight, Packaging=Carton, PCB Mount Retention=Without, PCB Mounting Orientation=Vertical, Pitch=2.54mm, Plating Thickness=0.8um, Radiation Hardening=No, REACH SVHC="No SVHC", RoHS=Yes, Row Spacing=2.54mm, Selectively Loaded="No (Without)", Series="AMPMODU MOD II", Stabilizers="No (Without)", Strain Relief="No (Without)", Supplier 1=RSComponents, Termination="Through Hole"
LED1/POWER LED2/STATUS: "20mA White Diffused -40℃~+85℃ RGB SMD5050 Light Emitting Diodes (LED) ROHS", LCSC Part Number=C409780, Manufacturer=MEIHUA, Package=SMD5050, ComponentLink1Description=LCSC, ComponentLink1URL=https://www.lcsc.com/product-detail/Light-Emitting-Diodes-LED_MEIHUA-MHP5050RGBDT_C409780.html, Item Type="RGB LED", Manufacturer Part Number=MHP5050RGBDT
Q1 Q2: "20V 3.5A 750mW 61mΩ@4.5V,3.3A 1V@250uA 1PCSPChannel SOT-23 MOSFETs ROHS", LCSC Part Number=C167138, Manufacturer=WILLSEMI, Package=SOT-23, ComponentLink1Description=LCSC, ComponentLink1URL=https://www.lcsc.com/product-detail/MOSFETs_WILLSEMI-Will-Semicon-WPM2341-3-TR_C167138.html, Item Type=Mosfet, Manufacturer Part Number=WPM2341-3/TR
R1 R2 R9 R11 R18 R21 R22 R23 R38 R40: library part RC0402FR-0710KL, "RES 10K OHM 1% 1/16W 0402", Case Code (Imperial)=0402, Case Code (Metric)=1005, LCSC Part Number=C60490, Manufacturer=Yageo, Max Operating Temperature=155°C, Max Power Dissipation=63mW, Min Operating Temperature=-55°C, Power Rating=62.5mW, Resistance=10kR, Resistance Tolerance=1%, Resistor Type="Thick Film", Supplier Part Number 1=603-RC0402FR-0710KL, Temperature Coefficient=100ppm/°C, Voltage Rating=50V, Case/Package=0402, Category="Chip SMD Resistors", ComponentLink1Description=https://datasheet.ciiva.com/7660/38568-7660787.pdf?src-supplier=Element14, ComponentLink1URL=https://datasheet.ciiva.com/7660/38568-7660787.pdf?src-supplier=Element14, ComponentLink2Description=https://datasheet.ciiva.com/7849/1686128-7849814.pdf?src-supplier=Element14, ComponentLink2URL=https://datasheet.ciiva.com/7849/1686128-7849814.pdf?src-supplier=Element14, ComponentLink3Description=https://datasheet.ciiva.com/7983/1018594-7983486.pdf?src-supplier=Element14, ComponentLink3URL=https://datasheet.ciiva.com/7983/1018594-7983486.pdf?src-supplier=Element14, ComponentLink4Description=https://datasheet.ciiva.com/22747/1018594-22747512.pdf?src-supplier=Element14, ComponentLink4URL=https://datasheet.ciiva.com/22747/1018594-22747512.pdf?src-supplier=Element14, ComponentLink5Description=https://datasheet.ciiva.com/12667/pyu-rc0402-51-rohs-l-6-r-12667067.pdf?src-supplier=Mouser, ComponentLink5URL=https://datasheet.ciiva.com/12667/pyu-rc0402-51-rohs-l-6-r-12667067.pdf?src-supplier=Mouser, ComponentLink6Description=https://datasheet.ciiva.com/7849/1784430-7849813.pdf?src-supplier=Element14, ComponentLink6URL=https://datasheet.ciiva.com/7849/1784430-7849813.pdf?src-supplier=Element14, ComponentLink7Description=https://datasheet.ciiva.com/7849/1784430-7849815.pdf?src-supplier=Element14, ComponentLink7URL=https://datasheet.ciiva.com/7849/1784430-7849815.pdf?src-supplier=Element14, Construction=Rectangular, Depth=0.5mm, Features="Moisture Resistant", Height=0.32mm, Item Type=Resistor, Lead Free="Lead Free", Lead Pitch=0.2mm, Length=1mm, Manufacturer Part Number=RC0402FR-0710KL, Military Standard=Not, Number of Pins=2, Number of Terminations=2, Packaging="Tape and Reel", Pricing 1="1=0.10000, 10=0.01400, 50=0.01400, 100=0.00500, 1000=0.00300, 10000=0.00200 (USD)", REACH SVHC="No SVHC", RoHS=Yes, RoHS Compliant=Yes, Series=RC, Stock 1=18648329, Supplier 1=Mouser, Termination=SMD/SMT, Tolerance=1%, Voltage Rating (DC)=50V, Width=0.5mm, Working Voltage=50V
R3 R26 R27: library part RC0402FR-070RL, "RES 0 OHM JUMPER 1/16W 0402", Case Code (Imperial)=0402, Case Code (Metric)=1005, LCSC Part Number=C106231, Manufacturer=Yageo, Max Operating Temperature=155°C, Max Power Dissipation=63mW, Min Operating Temperature=-55°C, Power Rating=62.5mW, Resistor Type="Thick Film", Supplier Part Number 1=603-RC0402FR-070RL, Temperature Coefficient=200ppm/°C, Tolerance=1%, Voltage Rating=50V, Case/Package=0402, ComponentLink1Description=https://datasheet.ciiva.com/8896/pyu-rc0402-51-rohs-l-6-8896149.pdf?src-supplier=Avnet, ComponentLink1URL=https://datasheet.ciiva.com/8896/pyu-rc0402-51-rohs-l-6-8896149.pdf?src-supplier=Avnet, ComponentLink2Description=https://datasheet.ciiva.com/16790/pyu-rc0402-51-rohs-l-6-r-16790444.pdf?src-supplier=Future+Electronics, ComponentLink2URL=https://datasheet.ciiva.com/16790/pyu-rc0402-51-rohs-l-6-r-16790444.pdf?src-supplier=Future+Electronics, Contact Plating=Tin,Matte, Features="Moisture Resistant", Height=0.35mm, Item Type=Resistors, Lead Free="Lead Free", Length=1mm, Manufacturer Part Number=RC0402FR-070RL, Mount="Surface Mount", Number of Terminations=2, Packaging="Tape and Reel", Pricing 1="1=0.10000, 10=0.01400, 50=0.01400, 100=0.00600, 1000=0.00300, 5000=0.00200, 10000=0.00100 (USD)", Radiation Hardening=No, Resistance=0R, RoHS=Yes, RoHS Compliant=Yes, Series=RC, Size Code=0402, Stock 1=8556842, Supplier 1=Mouser, Termination=SMD/SMT, Width=0.5mm
R4 R5 R6 R7: library part RC0402FR-0749R9L, "49.9Ω 62.5mW 50V ±100ppm/℃ Thick Film Resistor ±1% 0402 Chip Resistor - Surface Mount ROHS", LCSC Part Number=C87044, Manufacturer=YAGEO, Package=0402, ComponentLink1Description="LCSC Link", ComponentLink1URL=https://www.lcsc.com/product-detail/C87044.html, Item Type=Resistor, Manufacturer Part Number=RC0402FR-0749R9L
R8: library part RC0402FR-071K5L, "RES 1.5K OHM 1% 1/16W 0402", Case Code (Imperial)=0402, Case Code (Metric)=1005, LCSC Part Number=C114759, Manufacturer=Yageo, Max Operating Temperature=155°C, Max Power Dissipation=63mW, Min Operating Temperature=-55°C, Package Quantity=1, Power Rating=62.5mW, Resistance=1.5kR, Resistance Tolerance=1%, Resistor Type="Thick Film", Supplier Part Number 1=311-1.50KLRCT-ND, Temperature Coefficient=100ppm/°C, Voltage Rating=50V, Case/Package=0402, Category="Chip SMD Resistors", ComponentLink1Description=https://datasheet.ciiva.com/11808/0900766b80c66297-11808238.pdf?src-supplier=RSComponents, ComponentLink1URL=https://datasheet.ciiva.com/11808/0900766b80c66297-11808238.pdf?src-supplier=RSComponents, ComponentLink2Description=https://datasheet.ciiva.com/46394/1018594-46394950.pdf?src-supplier=Element14, ComponentLink2URL=https://datasheet.ciiva.com/46394/1018594-46394950.pdf?src-supplier=Element14, ComponentLink3Description=https://datasheet.ciiva.com/2453/pyu-r-int-thick-7-2453440.pdf?src-supplier=Digi-Key, ComponentLink3URL=https://datasheet.ciiva.com/2453/pyu-r-int-thick-7-2453440.pdf?src-supplier=Digi-Key, ComponentLink4Description=https://datasheet.ciiva.com/2453/pyu-r-int-thick-7-2453441.pdf?src-supplier=Digi-Key, ComponentLink4URL=https://datasheet.ciiva.com/2453/pyu-r-int-thick-7-2453441.pdf?src-supplier=Digi-Key, ComponentLink5Description=https://datasheet.ciiva.com/2453/pyu-r-int-thick-7-2453439.pdf?src-supplier=Digi-Key, ComponentLink5URL=https://datasheet.ciiva.com/2453/pyu-r-int-thick-7-2453439.pdf?src-supplier=Digi-Key, ComponentLink6Description=https://datasheet.ciiva.com/12558/pyu-rc0402-51-rohs-l-6-r-8721-12558542.pdf?src-supplier=Mouser, ComponentLink6URL=https://datasheet.ciiva.com/12558/pyu-rc0402-51-rohs-l-6-r-8721-12558542.pdf?src-supplier=Mouser, ComponentLink7Description=https://datasheet.ciiva.com/7849/1018594-7849863.pdf?src-supplier=Element14, ComponentLink7URL=https://datasheet.ciiva.com/7849/1018594-7849863.pdf?src-supplier=Element14, ComponentLink8Description=https://datasheet.ciiva.com/7849/1018594-7849864.pdf?src-supplier=Element14, ComponentLink8URL=https://datasheet.ciiva.com/7849/1018594-7849864.pdf?src-supplier=Element14, ComponentLink9Description=https://datasheet.ciiva.com/15189/getdatasheetpartid-323992-15189370.pdf?src-supplier=Verical, ComponentLink9URL=https://datasheet.ciiva.com/15189/getdatasheetpartid-323992-15189370.pdf?src-supplier=Verical, Construction=Rectangular, Depth=0.5mm, Features="Moisture Resistant", Height=0.016inch, Lead Free="Lead Free", Length=1mm, Manufacturer Part Number=RC0402FR-071K5L, Military Standard=Not, Number of Terminations=2, Packaging="Tape and Reel", Pricing 1="1=0.10000, 10=0.01500, 100=0.00610, 1000=0.00275, 2500=0.00239, 5000=0.00197 (USD)", REACH SVHC="No SVHC", RoHS=Yes, RoHS Compliant=Yes, Series=RC, Size Code=0402, Stock 1=2832947, Supplier 1=Digi-Key, Technology="THICK FILM", Termination=SMD/SMT, Tolerance=1%, Width=0.02inch
R10 R13: library part RC0402FR-0733RL, "RES 33 OHM 1% 1/16W 0402", Case Code (Imperial)=0402, Case Code (Metric)=1005, LCSC Part Number=C138002, Manufacturer=Yageo, Max Operating Temperature=155°C, Max Power Dissipation=63mW, Min Operating Temperature=-55°C, Package Quantity=10000, Power Rating=62.5mW, Resistance Tolerance=1%, Resistor Type="Thick Film", Supplier Part Number 1=603-RC0402FR-0733RL, Temperature Coefficient=100ppm/°C, Voltage Rating=50V, Case/Package=0402, Category="Chip SMD Resistors", ComponentLink1Description=https://datasheet.ciiva.com/11819/0900766b80c66297-11819487.pdf?src-supplier=RSComponents, ComponentLink1URL=https://datasheet.ciiva.com/11819/0900766b80c66297-11819487.pdf?src-supplier=RSComponents, ComponentLink2Description=https://datasheet.ciiva.com/24070/pyu-rc0402-51-rohs-l-6-r-8721-24070077.pdf?src-supplier=Mouser, ComponentLink2URL=https://datasheet.ciiva.com/24070/pyu-rc0402-51-rohs-l-6-r-8721-24070077.pdf?src-supplier=Mouser, ComponentLink3Description=https://datasheet.ciiva.com/7849/1018594-7849967.pdf?src-supplier=Element14, ComponentLink3URL=https://datasheet.ciiva.com/7849/1018594-7849967.pdf?src-supplier=Element14, ComponentLink4Description=https://datasheet.ciiva.com/7849/1018594-7849966.pdf?src-supplier=Element14, ComponentLink4URL=https://datasheet.ciiva.com/7849/1018594-7849966.pdf?src-supplier=Element14, ComponentLink5Description=https://datasheet.ciiva.com/15189/getdatasheetpartid-329253-15189431.pdf?src-supplier=Verical, ComponentLink5URL=https://datasheet.ciiva.com/15189/getdatasheetpartid-329253-15189431.pdf?src-supplier=Verical, ComponentLink6Description=https://datasheet.ciiva.com/17070/pyu-rc0402-51-rohs-l-6-r-17070335.pdf?src-supplier=Future+Electronics, ComponentLink6URL=https://datasheet.ciiva.com/17070/pyu-rc0402-51-rohs-l-6-r-17070335.pdf?src-supplier=Future+Electronics, Construction=Rectangular, Depth=0.5mm, Features="Moisture Resistant", Height=0.35mm, Lead Free="Lead Free", Length=1mm, Manufacturer Part Number=RC0402FR-0733RL, Military Standard=Not, Number of Pins=2, Number of Terminations=2, Packaging="Tape and Reel", Pricing 1="1=0.10000, 10=0.01200, 50=0.01200, 100=0.00500, 1000=0.00300, 10000=0.00100 (USD)", REACH SVHC=Unknown, Resistance=33R, RoHS=Yes, RoHS Compliant=Yes, Series=RC, Size Code=0402, Stock 1=1843488, Supplier 1=Mouser, Technology="THICK FILM", Termination=SMD/SMT, Tolerance=1%, Voltage Rating (DC)=50V, Width=0.5mm
R12 R14: library part RC0402FR-07470RL, "RES 470 OHM 1% 1/16W 0402", Case Code (Imperial)=0402, Case Code (Metric)=1005, LCSC Part Number=C114877, Manufacturer=Yageo, Max Operating Temperature=155°C, Max Power Dissipation=63mW, Min Operating Temperature=-55°C, Package Quantity=1, Power Rating=62.5mW, Resistance Tolerance=1%, Resistor Type="Thick Film", Temperature Coefficient=100ppm/°C, Voltage Rating=50V, Case/Package=0402, ComponentLink1Description=https://datasheet.ciiva.com/46412/1018594-46412838.pdf?src-supplier=Element14, ComponentLink1URL=https://datasheet.ciiva.com/46412/1018594-46412838.pdf?src-supplier=Element14, ComponentLink2Description=https://datasheet.ciiva.com/2453/pyu-r-int-thick-7-2453377.pdf?src-supplier=Digikey, ComponentLink2URL=https://datasheet.ciiva.com/2453/pyu-r-int-thick-7-2453377.pdf?src-supplier=Digikey, ComponentLink3Description=https://datasheet.ciiva.com/2453/pyu-r-int-thick-7-2453378.pdf?src-supplier=Digikey, ComponentLink3URL=https://datasheet.ciiva.com/2453/pyu-r-int-thick-7-2453378.pdf?src-supplier=Digikey, ComponentLink4Description=https://datasheet.ciiva.com/2453/pyu-r-int-thick-7-2453376.pdf?src-supplier=Digikey, ComponentLink4URL=https://datasheet.ciiva.com/2453/pyu-r-int-thick-7-2453376.pdf?src-supplier=Digikey, ComponentLink5Description=https://datasheet.ciiva.com/7850/1018594-7850015.pdf?src-supplier=Element14, ComponentLink5URL=https://datasheet.ciiva.com/7850/1018594-7850015.pdf?src-supplier=Element14, ComponentLink6Description=https://datasheet.ciiva.com/7850/1018594-7850014.pdf?src-supplier=Element14, ComponentLink6URL=https://datasheet.ciiva.com/7850/1018594-7850014.pdf?src-supplier=Element14, ComponentLink7Description=https://datasheet.ciiva.com/15189/getdatasheetpartid-330246-15189463.pdf?src-supplier=Verical, ComponentLink7URL=https://datasheet.ciiva.com/15189/getdatasheetpartid-330246-15189463.pdf?src-supplier=Verical, Construction=Rectangular, Depth=0.5mm, Features="Moisture Resistant", Height=0.016inch, Item Type=Resistor, Lead Free="Lead Free", Length=1mm, Manufacturer Part Number=RC0402FR-07470RL, Military Standard=Not, Number of Terminations=2, Packaging="Tape and Reel", Pricing="10000=0.00085 (USD)", Reach SVHC Compliant=No, RoHS=Yes, RoHS Compliant=Yes, Series=RC, Stock=10000, Supplier=Avnet, Supplier Part Number=RC0402FR-07470RL, Termination=SMD/SMT, Tolerance=1%, Voltage Rating (AC)=50V, Width=0.02inch, Working Voltage=50V
R15: library part RT0402BRD0712K1L, "RES SMD 12.1KOHM 0.1% 1/16W 0402", LCSC Part Number=C281773, Manufacturer=Yageo, Supplier Part Number=2068365, Category="Chip SMD Resistors", ComponentLink1Description=https://datasheet.ciiva.com/12812/pyu-rt-1-to-0-05-rohs-l-4-12812462.pdf?src-supplier=Mouser, ComponentLink1URL=https://datasheet.ciiva.com/12812/pyu-rt-1-to-0-05-rohs-l-4-12812462.pdf?src-supplier=Mouser, Item Type=Resistor, Manufacturer Part Number=RT0402BRD0712K1L, Pricing="10000=0.0245, 20000=0.0217, 30000=0.0237, 50000=0.0233, 100000=0.0228, 200000=0.022 (USD)", RoHS=Yes, Stock=60000, Supplier="Future Electronics"
R16: library part RC1206FR-071ML, "RES 1M OHM 1% 1/4W 1206", Case Code (Imperial)=1206, Case Code (Metric)=3216, LCSC Part Number=C108083, Manufacturer=Yageo, Max Operating Temperature=155°C, Max Power Dissipation=250mW, Min Operating Temperature=-55°C, Package Quantity=5000, Resistance=1MR, Resistance Tolerance=1%, Resistor Type="Thick Film", Temperature Coefficient=100ppm/°C, Voltage Rating=200V, Case/Package=1206, Category="Chip SMD Resistors", ComponentLink1Description=https://datasheet.ciiva.com/11819/0900766b80c6630a-11819912.pdf?src-supplier=RSComponents, ComponentLink1URL=https://datasheet.ciiva.com/11819/0900766b80c6630a-11819912.pdf?src-supplier=RSComponents, ComponentLink2Description=https://datasheet.ciiva.com/46445/444357-46445709.pdf?src-supplier=Element14, ComponentLink2URL=https://datasheet.ciiva.com/46445/444357-46445709.pdf?src-supplier=Element14, ComponentLink3Description=https://datasheet.ciiva.com/7857/444357-7857289.pdf?src-supplier=Element14, ComponentLink3URL=https://datasheet.ciiva.com/7857/444357-7857289.pdf?src-supplier=Element14, ComponentLink4Description=https://datasheet.ciiva.com/7857/444357-7857288.pdf?src-supplier=Element14, ComponentLink4URL=https://datasheet.ciiva.com/7857/444357-7857288.pdf?src-supplier=Element14, ComponentLink5Description=https://datasheet.ciiva.com/17033/pyu-rc1206-51-rohs-l-4-17033611.pdf?src-supplier=Future+Electronics, ComponentLink5URL=https://datasheet.ciiva.com/17033/pyu-rc1206-51-rohs-l-4-17033611.pdf?src-supplier=Future+Electronics, Construction=Rectangular, Depth=1.6mm, Features="Moisture Resistant", Height=0.55mm, Item Type=Resistor, Lead Free="Lead Free", Length=3.1mm, Manufacturer Part Number=RC1206FR-071ML, Military Standard=Not, Number of Terminations=2, Packaging="Tape and Reel", Power Rating=250mW, Pricing 1="5000=0.00412, 10000=0.00406, 20000=0.00394 (USD)", RoHS=Yes, RoHS Compliant=Yes, Series=RC, Size Code=1206, Stock 1=935000, Supplier 1=Avnet, Supplier Part Number 1=RC1206FR-071ML, Technology="THICK FILM", Termination=SMD/SMT, Tolerance=1%, Width=1.6mm
R17 R19 R20 R39 R41 R43 R45 R46 R47: library part AC0402FR-070RL, "RESISTOR 0402 JUMPER ZERO OHM", Case Code (Imperial)=0402, Case Code (Metric)=1005, LCSC Part Number=C226739, Manufacturer=Yageo, Max Operating Temperature=155°C, Min Operating Temperature=-55°C, Power Rating=62.5mW, Supplier Part Number=13-AC0402FR-070RLDKR-ND, Temperature Coefficient=200ppm/°C, Tolerance=1%, Voltage Rating=50V, Case/Package=0402, Category="Chip SMD Resistors", ComponentLink1Description=https://datasheet.ciiva.com/12656/pyu-ac-51-rohs-l-2-12656734.pdf?src-supplier=Mouser, ComponentLink1URL=https://datasheet.ciiva.com/12656/pyu-ac-51-rohs-l-2-12656734.pdf?src-supplier=Mouser, ComponentLink2Description=LCSC, ComponentLink2URL=https://www.lcsc.com/product-detail/Chip-Resistor-Surface-Mount_YAGEO-AC0402FR-070RL_C226739.html, Height=370um, Item Type=Resistor, Manufacturer Part Number=AC0402FR-070RL, Packaging="Tape and Reel", Pricing="1=0.1, 10=0.017, 25=0.0132, 50=0.01, 100=0.0071, 250=0.00568, 500=0.00454, 1000=0.00335, 5000=0.0024 (USD)", RoHS=Yes, Series=AC, Stock=337140, Supplier=Digi-Key, Termination=SMD/SMT